# Altium PCB BombasConMUX.PcbDoc
Units mm, origin at the board's own origin, x right, y up, seen from the top; angles counter-clockwise.
Board outline 50 x 100 mm, 2 copper layers (Top Layer, Bottom Layer); 19 components, 15 nets, 95 pads, 7 vias.
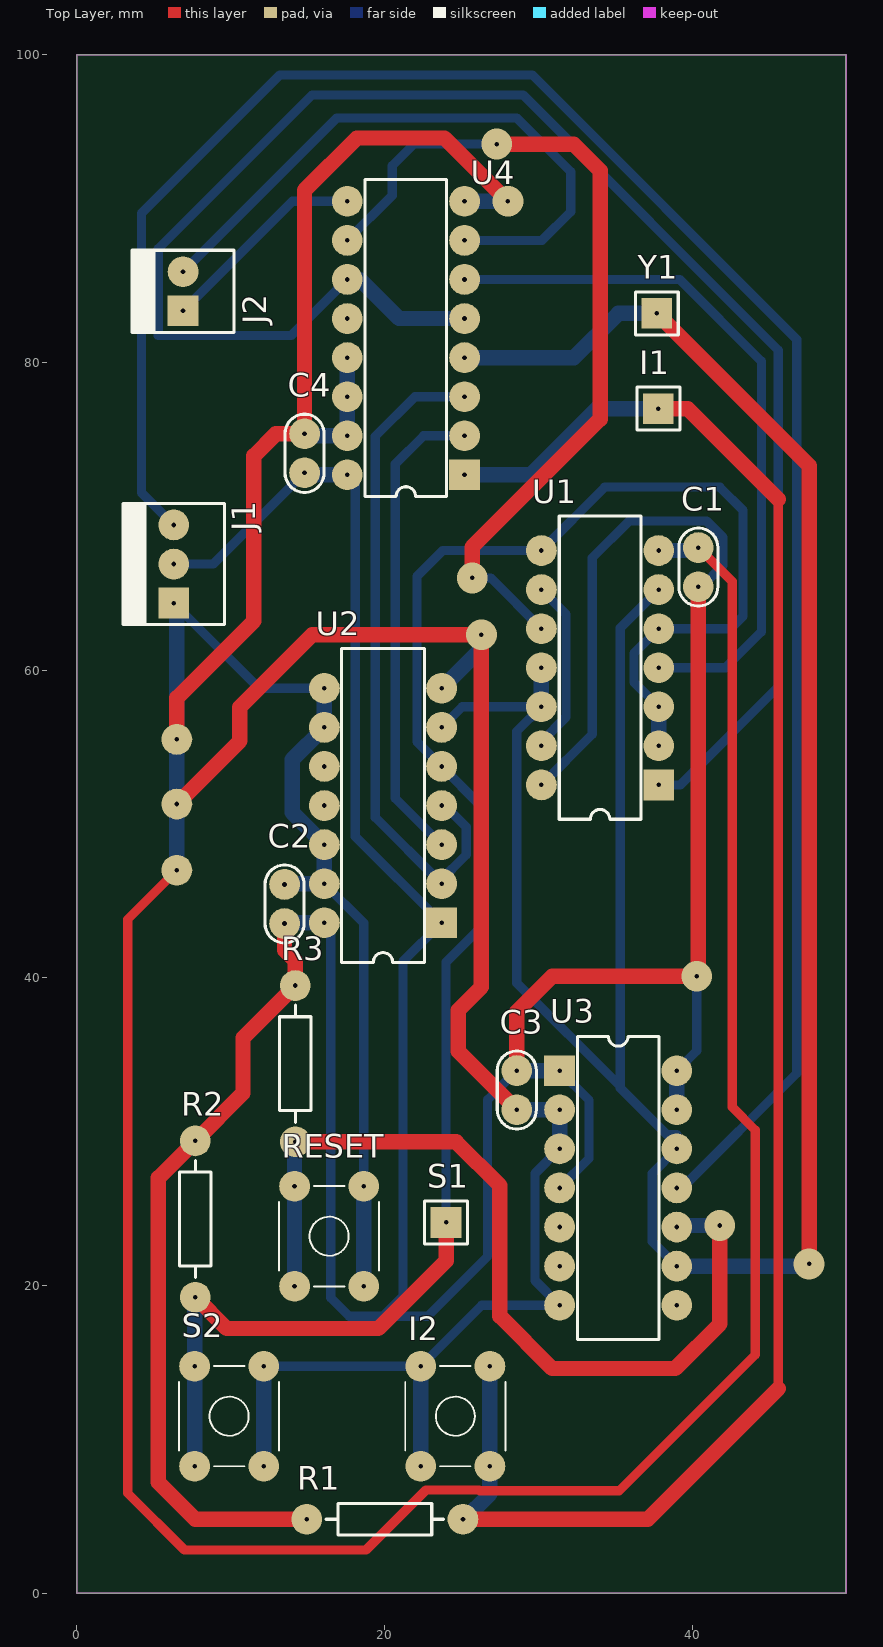
[diagram p0: Top Layer view]
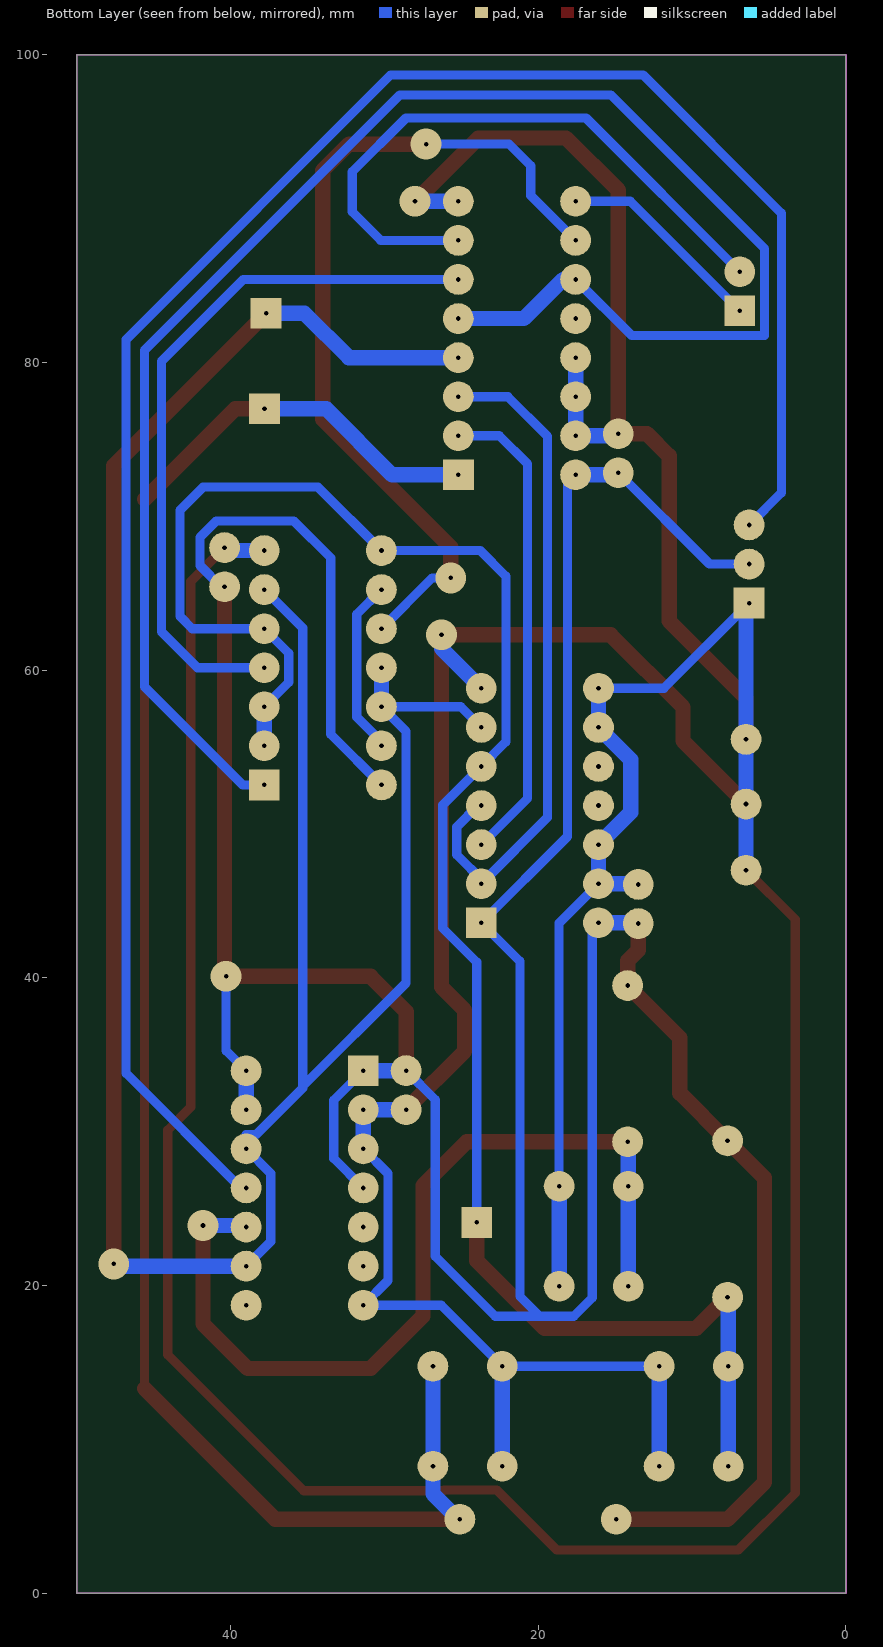
[diagram p1: Bottom Layer view, seen from below]
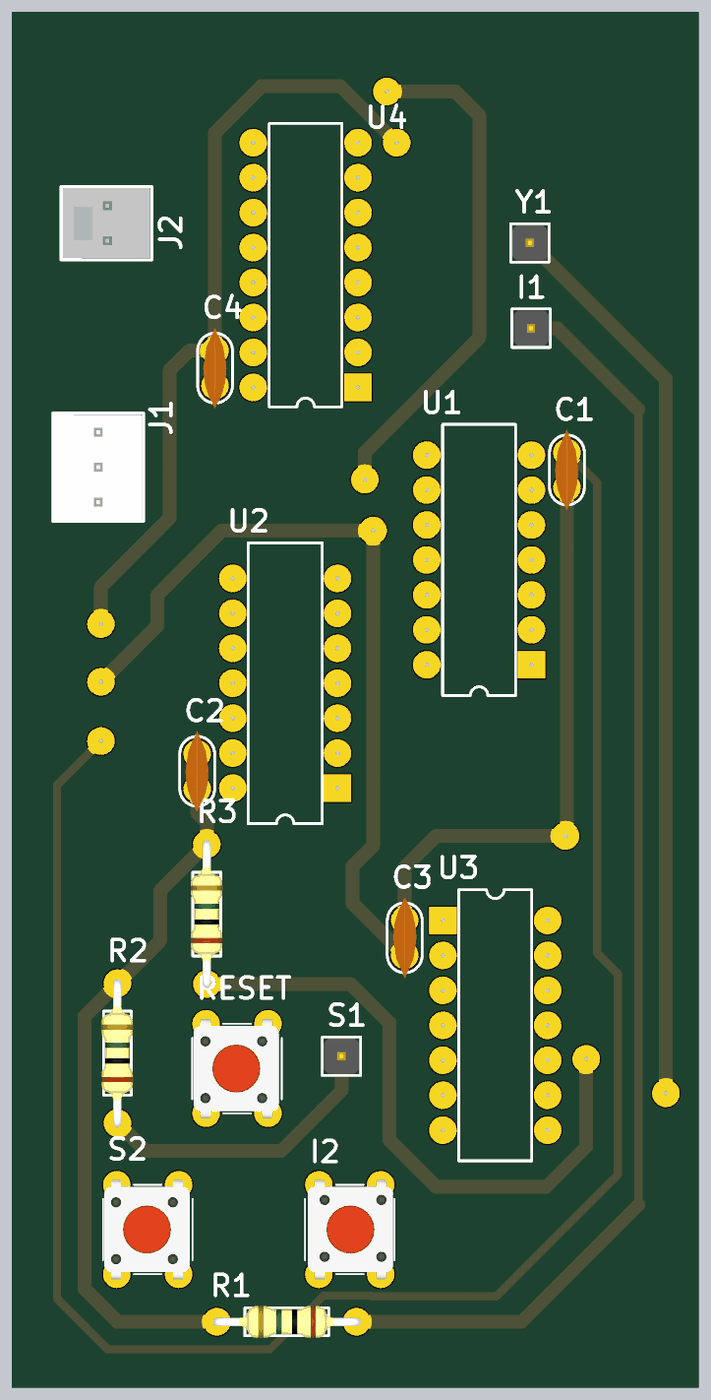
[diagram p2: 3D render of the assembled board from above, using the file's embedded part models]

## Layer stack, top to bottom
Top Solder: solder mask 0.0102, Solder Resist, Dk 3.5
Top Layer: signal copper 0.0356
Dielectric 1: dielectric 0.32, FR-4, Dk 4.8
Bottom Layer: signal copper 0.0356
Bottom Solder: solder mask 0.0102, Solder Resist, Dk 3.5

## Board outline
0,0 50,0 50,100 0,100

## Design rules (kind name [scope] priority, off if disabled: settings)
Clearance [All] p1: gap=0.3 ignorepadtopadclearanceinfootprint=FALSE
PolygonConnect [All] p1: connectstyle=Relief reliefconductorwidth=0.254 reliefentries=4 polygonreliefangle="90 Angle" airgapwidth=0.254
RoutingVias [All] p1: holewidth=0.3 width=2 viastyle="Through Hole" minholewidth=0.3 minwidth=2 maxholewidth=0.3 maxwidth=2
SolderMaskExpansion [All] p1: expansion=0.102
Width [All] p1: maxlimit=1 minlimit=0.6 preferedwidth=0.6
30 further rules are at their usual default settings.

## Components (designator, comment, footprint, x,y, rotation, side; value= is the part's Value field where it differs from the comment)
C1 "100n" CAP100 40.4,66.7 r90 top
C2 "100n" CAP100 13.5,44.8 r90 top
C3 "100n" CAP100 28.6,32.7 r270 top
C4 "100n" CAP100 14.8,74.1 r90 top
I1 "I" TPTH 37.8,77 r0 top
I2 "I BUTTON" TACTSWITCH 24.6,11.5 r0 top value=PULSADOR
J1 "MOLEX3" MOLEX3 6.3,64.36 r90 top
J2 "MOLEX2" MOLEX2 6.9,83.36 r90 top
R1 "100K" RES400 25.1,4.8 r180 top
R2 "100K" RES400 7.7,19.24 r90 top
R3 "100K" RES400 14.2,29.34 r90 top
RESET "RESET BUTTON" TACTSWITCH 16.4,23.2 r180 top value=PULSADOR
S1 "S" TPTH 24,24.1 r0 top
S2 "S BUTTON" TACTSWITCH 9.9,11.5 r180 top value=PULSADOR
U1 "MC74HC02AN" 646-06 34.01,60.16 r90 top
U2 "MC14070BCL" 632-08 19.9,51.2 r90 top
U3 "SN74LS74AN" N014D 35.19,26.34 r270 top value=74LS74
U4 "SN54HC157J" J016 21.39,81.59 r90 top
Y1 "Y" TPTH 37.7,83.2 r0 top

## Footprints (in the part's own frame and the unit in brackets; to place one, negate y for a bottom-side part, rotate by r counter-clockwise, add the part's x,y. Pads: shape width x height; smd on the part's side, far side on the other; paste and mask are expansions set on the pad)
632-08 [mm] "DIP; 14 Leads; Row Spacing 7.62 mm; Pitch 2.54 mm"
  rect 2x2 hole 0.3: 1(-7.62,-3.81)
  round 2 hole 0.3: 2(-5.08,-3.81) 3(-2.54,-3.81) 4(0,-3.81) 5(2.54,-3.81) 6(5.08,-3.81) 7(7.62,-3.81) 8(7.62,3.81) 9(5.08,3.81) 10(2.54,3.81) 11(0,3.81) 12(-2.54,3.81) 13(-5.08,3.81) 14(-7.62,3.81)
  silkscreen extent -10.2,-2.7 10.2,2.7
646-06 [mm] "DIP; 14 Leads; Row Spacing 7.62 mm; Pitch 2.54 mm"
  rect 2x2 hole 0.3: 1(-7.62,-3.81)
  round 2 hole 0.3: 2(-5.08,-3.81) 3(-2.54,-3.81) 4(0,-3.81) 5(2.54,-3.81) 6(5.08,-3.81) 7(7.62,-3.81) 8(7.62,3.81) 9(5.08,3.81) 10(2.54,3.81) 11(0,3.81) 12(-2.54,3.81) 13(-5.08,3.81) 14(-7.62,3.81)
  silkscreen extent -9.85,-2.65 9.85,2.65
CAP100 [mm]
  round 2 hole 0.3: 1(-1.27,0) 2(1.27,0)
  silkscreen extent -2.54,-1.27 2.54,1.27, body extent -2.92,-0.84 2.92,0.86, height 6.12
J016 [mm] "DIP; 16 Leads; Row Spacing 7.62 mm; Pitch 2.54 mm"
  rect 2x2 hole 0.3: 1(-8.89,-3.81)
  round 2 hole 0.3: 2(-6.35,-3.81) 3(-3.81,-3.81) 4(-1.27,-3.81) 5(1.27,-3.81) 6(3.81,-3.81) 7(6.35,-3.81) 8(8.89,-3.81) 9(8.89,3.81) 10(6.35,3.81) 11(3.81,3.81) 12(1.27,3.81) 13(-1.27,3.81) 14(-3.81,3.81) 15(-6.35,3.81) 16(-8.89,3.81)
  silkscreen extent -10.3,-2.65 10.3,2.65
MOLEX2 [mm]
  rect 2x2 hole 0.3: 1(0,0)
  round 2 hole 0.3: 2(2.54,0)
  silkscreen extent -1.4,-3.3 3.94,3.3, body extent -1.27,-3.17 3.81,3.18, height 10.74
MOLEX3 [mm]
  rect 2x2 hole 0.3: 1(0,0)
  round 2 hole 0.3: 2(2.54,0) 3(5.08,0)
  silkscreen extent -1.4,-3.3 6.48,3.3, body extent -1.27,-3.17 6.35,3.18, height 10.74
N014D [mm] "DIP; 14 Leads; Row Spacing 7.62 mm; Pitch 2.54 mm"
  rect 2x2 hole 0.3: 1(-7.62,-3.81)
  round 2 hole 0.3: 2(-5.08,-3.81) 3(-2.54,-3.81) 4(0,-3.81) 5(2.54,-3.81) 6(5.08,-3.81) 7(7.62,-3.81) 8(7.62,3.81) 9(5.08,3.81) 10(2.54,3.81) 11(0,3.81) 12(-2.54,3.81) 13(-5.08,3.81) 14(-7.62,3.81)
  silkscreen extent -9.85,-2.65 9.85,2.65
RES400 [mm]
  round 2 hole 0.3: 1(0,0) 2(10.16,0)
  silkscreen extent 1.27,-1.02 8.89,1.02, body extent -0.3,-1.14 10.46,1.17, height 2.43
TACTSWITCH [mm]
  round 2 hole 0.3: 1(-2.25,-3.25) 2(-2.25,3.25) 3(2.25,-3.25) 4(2.25,3.25)
  silkscreen extent -3.25,-3.25 3.25,3.25, body extent -3.05,-3.95 3.15,3.95, height 7
TPTH [mm]
  rect 2x2 hole 0.3: 1(0,0)
  silkscreen extent -1.4,-1.4 1.4,1.4, body extent -1.27,-1.27 1.27,1.27, height 6.04

## Part data
C1 C2 C3 C4: library part CAP
I1 S1 Y1: library part TP
I2 RESET S2: library part "TACT SWITCH"
R1 R2 R3: library part RES
U1: "Quad 2-Input NOR Gate", ComponentLink1Description="Manufacturer Link", ComponentLink1URL=http://www.onsemi.com/site/products/parametrics/0,4446,247,00.html, ComponentLink2Description="Ibis Model", ComponentLink2URL=http://www.onsemi.com/pub/Collateral/MC54HC02AJ.IBS, DatasheetVersion=1989, LatestRevisionDate=06-Jun-2005, LatestRevisionNote="Stylized 3D Model Added", PackageDescription="DIP; 14 Leads; Row Spacing 7.62 mm; Pitch 2.54 mm", PackageReference=646-06, PackageVersion=1997, Published=17-Jul-2002, Publisher="Altium Limited"
U2: "Quad XOR Gate", ComponentLink1Description="Manufacturer Link", ComponentLink1URL=http://www.onsemi.com/, ComponentLink2Description=Datasheet, ComponentLink2URL=http://www.onsemi.com/pub/Collateral/MC14070B-D.PDF, DatasheetVersion=1995, PackageDescription="DIP; 14 Leads; Row Spacing 7.62 mm; Pitch 2.54 mm", PackageReference=632-08, PackageVersion=1995, Published=15-Apr-2002, Publisher="Altium Limited"
U3: "Dual D-Type Positive-Edge-Triggered Flip-Flop with Preset and Clear"
U4: "Quadraple 2-Line to 1-Line Data Selector/Multiplexer", ComponentLink1Description="Manufacturer Link", ComponentLink1URL=http://www.ti.com/, ComponentLink2Description=Datasheet, ComponentLink2URL=http://www-s.ti.com/sc/ds/sn74hc157.pdf, DatasheetVersion=May-1997, LatestRevisionDate=04-Mar-2005, LatestRevisionNote="Stylized 3D Model Added.", PackageDescription="DIP; 16 Leads; Row Spacing 7.62 mm; Pitch 2.54 mm", PackageReference=J016, PackageVersion=Jun-1999, Published=8-Jun-2000, Publisher="Altium Limited"

## Free pads (board coordinates)
  round 2 hole 0.3: 2(6.5,55.5) 3(6.5,51.3) 4(6.5,47)

## Via types
v1: diameter 2, hole 0.3, Top Layer to Bottom Layer, 7 vias

## Nets (pads, with @x,y where several pads share a name; then routed paths per layer and width w, separated by ;. In a path a pad name is that pad's centre, name@x,y a point inside that pad or via, vN(x,y) a via of type N, cw(c..) or ccw(c..) an arc to the next point about the centre after c; other vN are vias at no path point)
B1: J2.2 U4.7 | length 41.1
  Bottom Layer w0.6: J2.2 16.9,95.9 28.6,95.9 32.1,92.4 32.1,89.8 30.24,87.94 U4.7
B2: J2.1 U4.9 | length 13.6
  Bottom Layer w0.6: J2.1 14.02,90.48 U4.9
CLK: J1.3 U3.11 | length 133.2
  Bottom Layer w0.6: J1.3 4.2,71.54 4.2,89.7 13.2,98.7 29.6,98.7 46.8,81.5 46.8,33.8 39.34,26.34 U3.11
GND: C1.2 C2.2 C3.2 C4.2 I2.1 I2.2 J1.1 pad.2 pad.3 pad.4 RESET.1 RESET.2 S2.1 S2.2 U1.7 U2.7 U2.8 U2.9 U2.12 U2.13 U3.2 U3.3 U3.7 U4.8 U4.13 U4.14 U4.15 | length 400.9
  Top Layer w0.6: pad.4 3.3,43.8 3.3,6.5 7,2.8 18.8,2.8 22.7,6.7 26.137,6.7 26.187,6.65 35.25,6.65 44.1,15.5 44.1,30.1 42.6,31.6 42.6,65.77 C1.2
  Top Layer w1: pad.3 10.6,55.4 10.6,57.6 15.3,62.3 v1(26.3,62.3) 26.3,39.4 24.8,37.9 24.8,35.224 28.594,31.43 C3.2 ; pad.2 6.5,58.2 11.5,63.2 11.5,73.93 12.94,75.37 C4.2 14.8,91.2 18.2,94.6 23.9,94.6 v1(28.02,90.48)
  Bottom Layer w0.6: J1.1 6.5,64.16 11.84,58.82 U2.8 ; S2.1 I2.2 26.32,18.72 U3.7 29.78,20.32 29.78,27.28 U3.3 ; U2.13 18.65,43.56 RESET.1
  Bottom Layer w1: pad.4 pad.3 pad.2 J1.1@6.5,64.16 ; S2.2 S2.1 ; C2.2 13.55,46.12 U2.13 U2.12 16.084,48.66 14,50.744 14,54.196 16.084,56.28 U2.9 U2.8 ; C4.2 14.93,75.24 U4.15 U4.14 U4.13 ; RESET.2 RESET.1 ; I2.1 I2.2 ; U2.7 26.3,61.41 v1(26.3,62.3) ; U4.8 v1(28.02,90.48) ; C3.2 31.37,31.43 U3.2 U3.3 ; U1.7 40.21,67.78 C1.2
I: I1.1 I2.3 I2.4 R1.1 U4.1 | length 117.2
  Top Layer w0.6: 45.6,13.3 45.6,71.1
  Top Layer w1: R1.1 37.1,4.8 45.6,13.3 ; I1.1 39.7,77 45.6,71.1
  Bottom Layer w1: R1.1@25.15,4.75 26.85,6.45 I2.3 I2.4 ; U4.1 29.5,72.7 33.8,77 I1.1
M1_0: U2.3 U4.2 | length 31.2
  Bottom Layer w0.6: U2.3 20.7,51.67 20.7,73.4 22.54,75.24 U4.2
M1_1: U2.2 U2.4 U4.3 | length 44.2
  Bottom Layer w0.6: U2.2 U2.2@23.571,46.259 ; U2.4 23.92,51.2 25.31,49.81 25.31,47.997 U2.2@23.571,46.259 ; U4.3 21.98,77.78 19.4,75.2 19.4,50.43 U2.2@23.571,46.259
M2_0: U1.1 U4.5 U4.11 | length 111.7
  Bottom Layer w0.6: U4.11 13.933,81.753 5.291,81.753 5.291,87.391 15.3,97.4 29,97.4 45.6,80.8 45.6,58.917 39.223,52.54 U1.1
  Bottom Layer w1: U4.11 18.4,85.4 20.94,82.86 U4.5
M2_1: U1.4 U4.6 | length 46.7
  Bottom Layer w0.6: U4.6 39.186,85.4 44.5,80.086 44.5,62.5 42.16,60.16 U1.4
M3_1: U1.10 U4.10 | length 56.7
  Top Layer w1: v1(25.7,66) 25.7,68 34.019,76.319 34.019,92.481 32.3,94.2 v1(27.3,94.2)
  Bottom Layer w0.6: U4.10@17.586,87.94 20.5,90.854 20.5,92.8 21.9,94.2 v1(27.3,94.2) ; v1(25.7,66) 26.9,66 U1.10
  Bottom Layer w1: U4.10 U4.10@17.586,87.94
NetU1_9: U1.9 U1.13 | length 11.5
  Bottom Layer w0.6: U1.13 30.2,55.357 31.8,56.957 31.8,63.64 U1.9
RESET: R3.1 RESET.3 RESET.4 U3.10 | length 58.5
  Top Layer w1: R3.1 24.66,29.34 27.5,26.5 27.5,18 30.9,14.6 38.9,14.6 41.8,17.5 v1(41.8,23.9)
  Bottom Layer w1: RESET.4 RESET.3 R3.1@14.15,29.34 ; U3.10 39.1,23.9 v1(41.8,23.9)
S: R2.1 S1.1 S2.3 S2.4 U1.2 U1.3 U1.5 U1.8 U2.5 | length 122.9
  Top Layer w1: R2.1 9.74,17.2 19.6,17.2 24,21.6 S1.1
  Bottom Layer w0.6: S1.1 24,41.021 26.21,43.231 26.21,51.24 U2.5 22.11,55.34 22.11,66.11 23.78,67.78 U1.8 34.32,71.9 41.8,71.9 43.3,70.4 43.3,63.5 42.5,62.7 U1.5 36.22,61.1 36.22,59.22 U1.3
  Bottom Layer w1: S2.4 S2.3 R2.1@7.65,19.24 ; U1.2 U1.3
VCC: C1.1 C2.1 C3.1 C4.1 J1.2 R1.2 R2.2 R3.2 U1.14 U2.1 U2.14 U3.1 U3.4 U3.13 U3.14 U4.16 | length 269.3
  Top Layer w0.6: v1(40.3,40.1) v1@40.6,40.4
  Top Layer w1: C2.1 13.5,41.8 14.2,41.1 R3.2 10.8,36.1 10.8,32.5 R2.2 5.3,27 5.3,7.2 7.7,4.8 R1.2 ; C3.1 28.6,37.8 30.9,40.1 v1(40.3,40.1) ; v1@40.4,40.2 C1.1
  Bottom Layer w0.6: J1.2 8.87,66.9 C4.1 ; U2.14 16.5,43.17 16.5,19.2 17.7,18 19.9,18 ; U4.16 18.1,72.18 18.1,49.19 U2.1 21.2,41.07 21.2,19.3 19.9,18 ; C3.1 26.7,32.07 26.7,21.9 22.8,18 19.9,18 ; U1.14 33.5,55.84 33.5,67.3 35.9,69.7 40.933,69.7 42,68.633 42,66.8 40.63,65.43 C1.1 ; U3.4 33.3,28.26 33.3,32.04 U3.1 ; U3.14 40.3,35.26 v1(40.3,40.1)
  Bottom Layer w1: C2.1 13.55,43.58 U2.14 ; C4.1 14.93,72.7 U4.16 ; C3.1 28.61,33.96 U3.1 ; U3.13 U3.14
Y: U1.6 U1.11 U1.12 U2.6 U3.9 U3.12 U4.4 Y1.1 | length 174.2
  Top Layer w1: Y1.1 47.6,73.3 47.6,23.1 v1(47.6,21.4)
  Bottom Layer w0.6: U2.6 25.05,57.62 U1.12 28.6,56.02 28.6,39.669 35.32,32.949 ; U1.6 35.32,62.74 35.32,32.949 ; U3.9 37.4,22.86 37.4,27.28 U3.12 39,29.82 38.337,29.82 35.32,32.837 35.32,32.949
  Bottom Layer w1: U4.4 32.32,80.32 35.2,83.2 Y1.1 ; U1.12 U1.11 ; U3.9 47.46,21.26 v1(47.6,21.4)
pads on no net: U2.10 U2.11 U3.5 U3.6 U3.8 U4.12

## Keep-outs
Keep-Out Layer:
  the board outline again, w0.1